# EAGLE board sensorpcb (EAGLE 7.2.0)
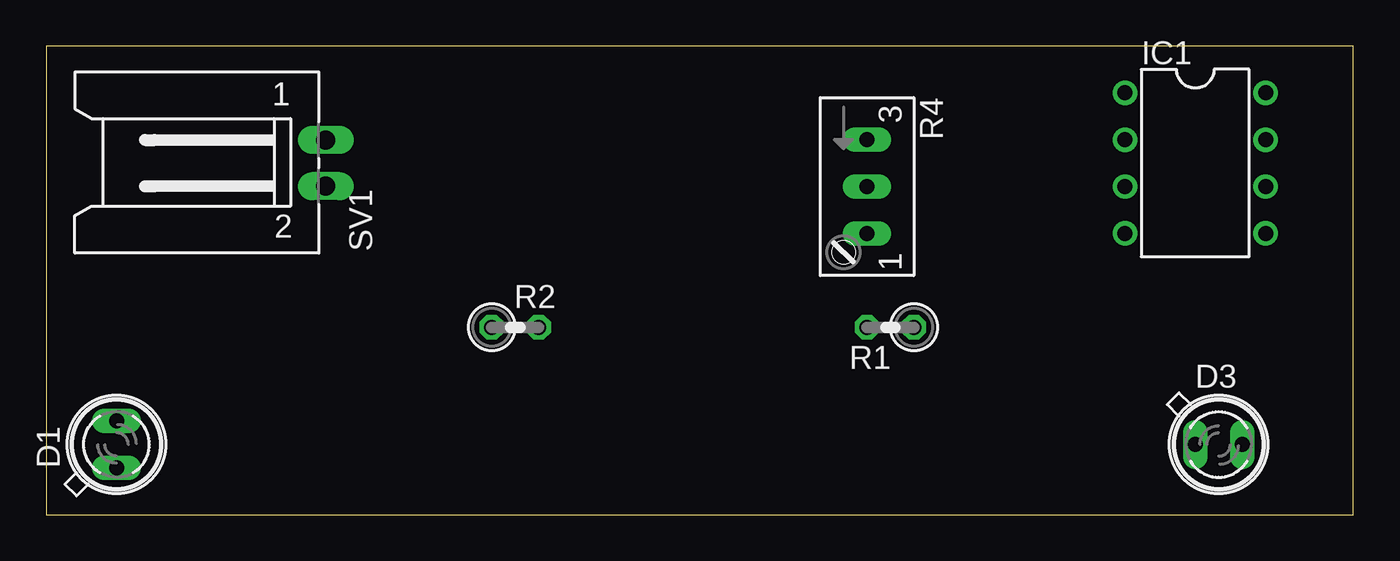
[diagram p0: board, top side]
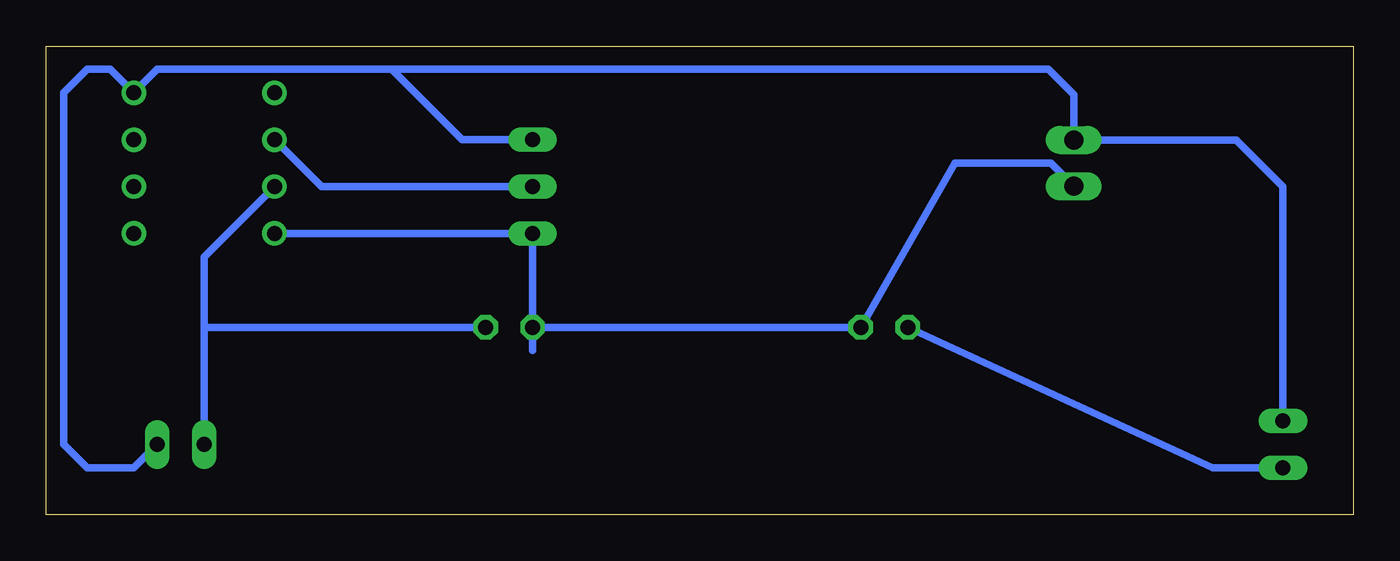
[diagram p1: board, bottom side, seen from below]

Size 70.79 x 25.39 mm. Coordinates in mm from the lower left corner, seen from the top.
Outline: 0,0 70.79,0 70.79,25.39 0,25.39 0,0
Copper layers (1*16): Top 0.035mm / dielectric 1.5mm / Bottom 0.035mm
Design rules "default": minimum track width 10mil, minimum drill 24mil, track to track 8mil, track to pad 8mil, pad to pad 8mil, via to via 8mil, smd to smd 8mil, copper to edge 40mil, drill to drill 8mil, minimum pad ring 10mil, minimum via ring 8mil, stop-mask expansion 4mil, vias tented up to drill 0mil, thermal gap 10mil

## Footprints (pad centres in the part's own frame; a part is rotated, then mirrored left to right if it is on the bottom)
SFH482 = drill 0.813 long: A -1.27,0; K 1.27,0
DIL08 = drill 0.813 pad 1.27: 1 -3.81,-3.81; 2 -1.27,-3.81; 3 1.27,-3.81; 4 3.81,-3.81; 5 3.81,3.81; 6 1.27,3.81; 7 -1.27,3.81; 8 -3.81,3.81
0207/2V = drill 0.813 octagon: 1 -1.27,0; 2 1.27,0
S64W = drill 0.813 long: A 2.54,1.27; E -2.54,1.27; S 0,1.27
L02P = drill 1.016 long: 1 1.25,-6.25; 2 -1.25,-6.25

## Placement (x,y rotation side)
D1  SFH482  [SFH482]  3.81,3.81 90 top
D3  SFH482  [SFH482]  63.5,3.81 0 top
IC1  LM358N  [DIL08]  62.23,19.05 270 top
R1  [0207/2V]  45.72,10.16 180 top
R2  [0207/2V]  25.4,10.16 0 top
R4  [S64W]  43.18,17.78 270 top
SV1  [L02P]  8.89,19.05 90 top

## Library data of the parts
D1 D3 = led
IC1 = linear
R1 R2 = resistor
R4 = pot
SV1 = con-amp-mt; OC_FARNELL: unknown; OC_NEWARK: unknown

## Nets
N$1: IC1.4 R1.2 R2.2 R4.A SV1.2
N$2: D3.A IC1.3 R1.1
N$3: D1.A R2.1
N$4: IC1.2 R4.S
N$5: D1.K D3.K IC1.8 R4.E SV1.1

## Tracks (layer width: path | path; a pad name or v marks a point on that pad's centre or on a via)
N$1
  Bottom 0.406: R1.2 R2.2 21.59,19.05 16.39,19.05 SV1.2 | R1.2 R4.A IC1.4 | 44.45,8.89 R1.2
N$2
  Bottom 0.406: D3.A 62.23,10.16 | 62.23,10.16 62.23,13.97 IC1.3 | R1.1 62.23,10.16
N$3
  Bottom 0.406: D1.A 7.62,2.54 R2.1
N$4
  Bottom 0.406: R4.S 55.88,17.78 IC1.2
N$5
  Bottom 0.406: 52.07,24.13 64.77,24.13 IC1.8 67.31,24.13 68.58,24.13 69.85,22.86 69.85,3.81 68.58,2.54 66.04,2.54 D3.K | 52.07,24.13 16.51,24.13 15.14,22.76 SV1.1 6.33,20.3 3.81,17.78 D1.K | R4.E 48.26,20.32 52.07,24.13
(copper drawn outside any net)
  shapes: Bottom area x1